# Altium PCB Buck Converter.PcbDoc
Units mm, origin at the board's own origin, x right, y up, seen from the top; angles counter-clockwise.
Board outline 28.43 x 16.88 mm, 2 copper layers (Top Layer, Bottom Layer); 9 components, 6 nets, 22 pads, 6 vias.
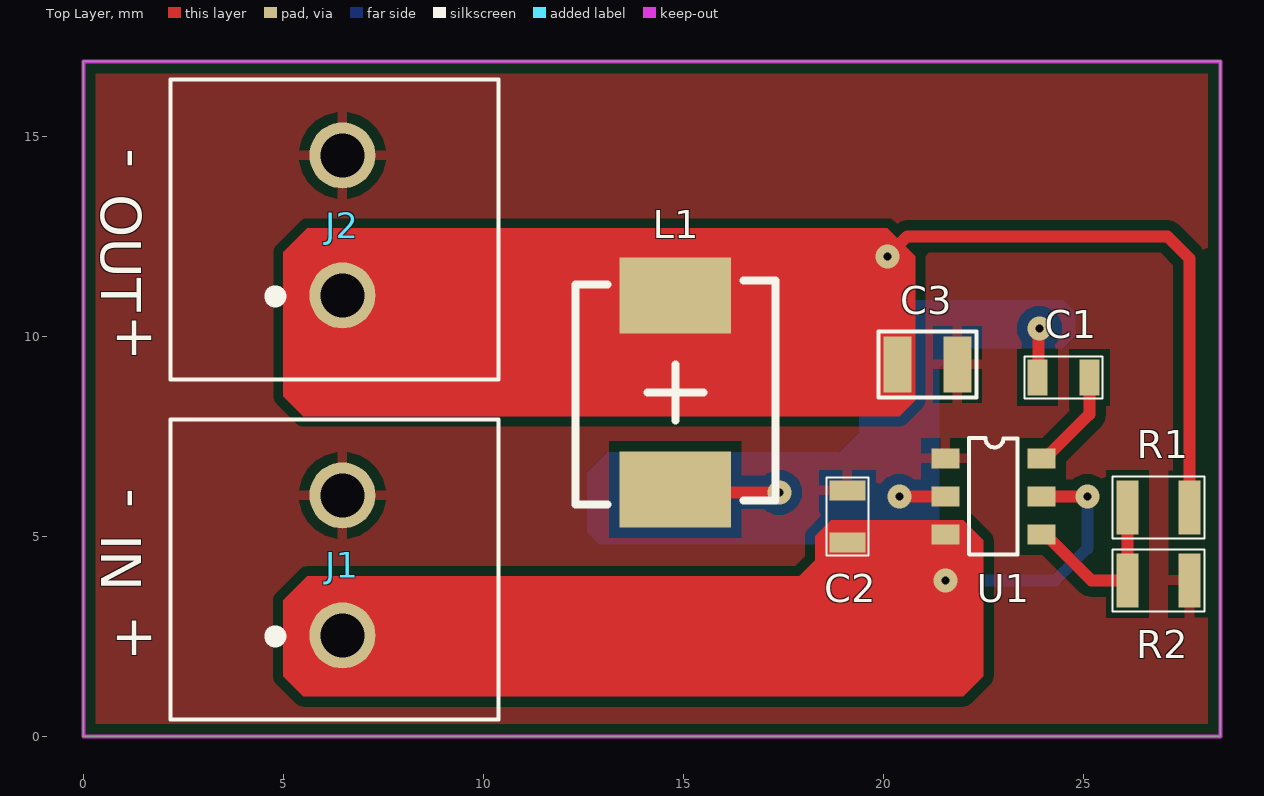
[diagram p0: Top Layer view]
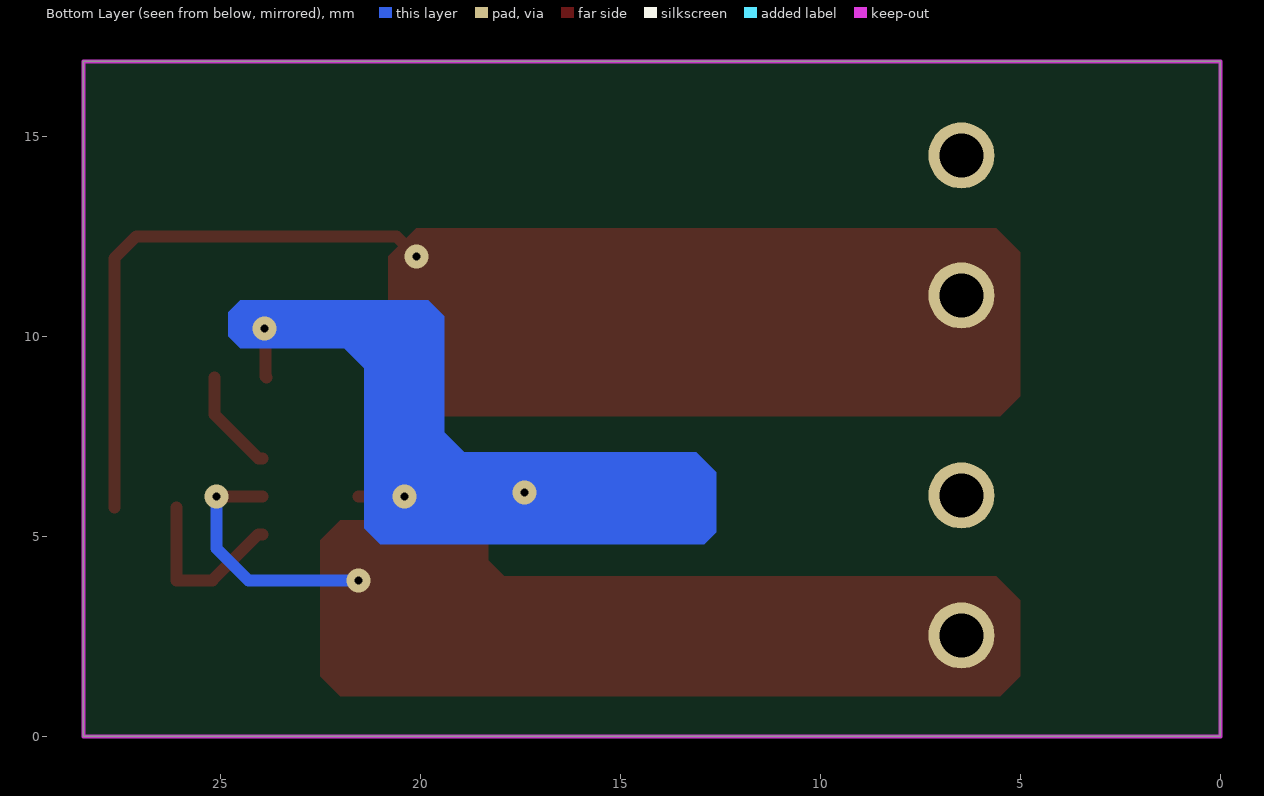
[diagram p1: Bottom Layer view, seen from below]
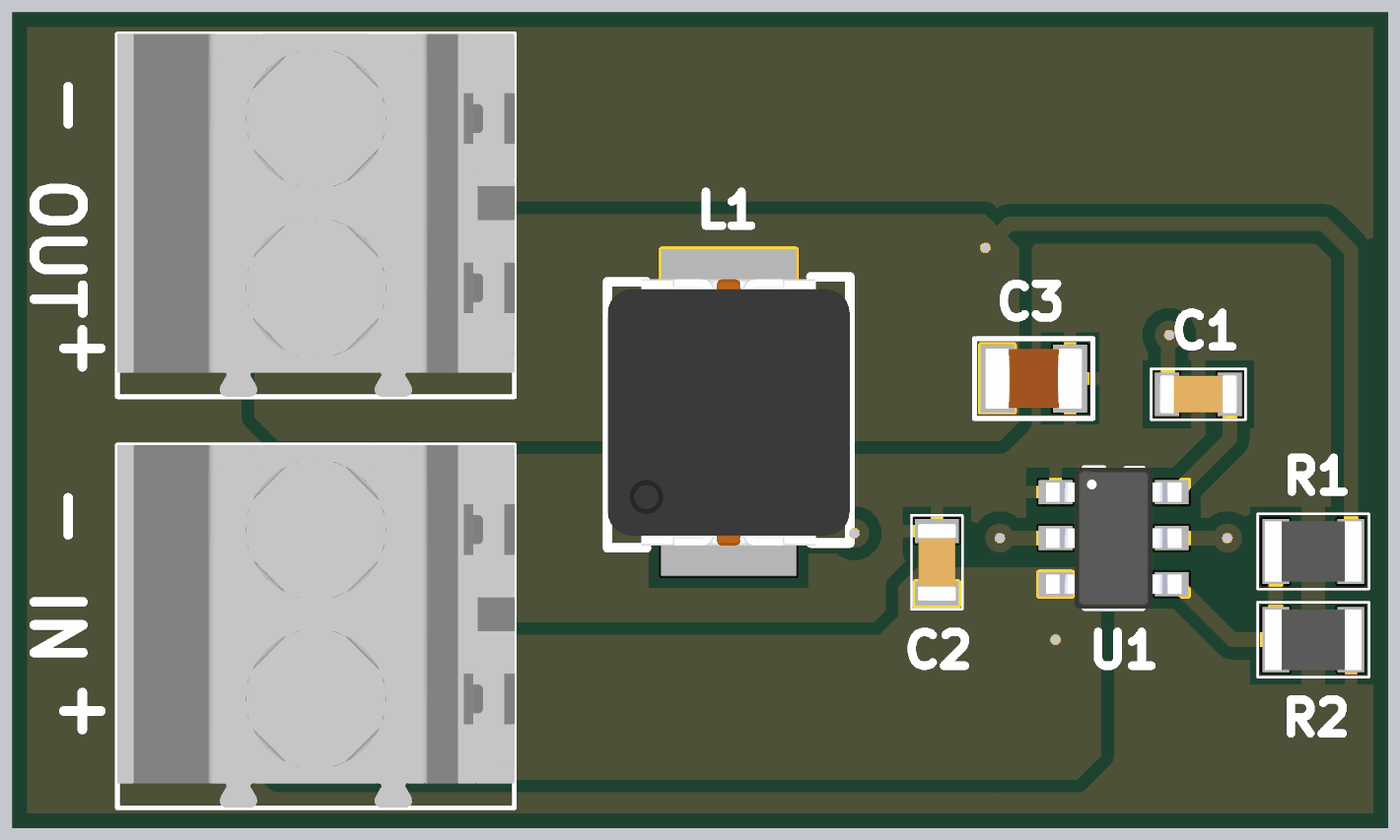
[diagram p2: 3D render of the assembled board from above, using the file's embedded part models]

## Layer stack, top to bottom
Top Solder: solder mask 0.0102, Solder Resist, Dk 3.5
Top Layer: signal copper 0.0356
Dielectric 1: dielectric 0.32, FR-4, Dk 4.8
Bottom Layer: signal copper 0.0356
Bottom Solder: solder mask 0.0102, Solder Resist, Dk 3.5

## Board outline
0,0 28.425,0 28.425,16.875 0,16.875

## Design rules (kind name [scope] priority, off if disabled: settings)
Clearance [All] p1: gap=0.254 ignorepadtopadclearanceinfootprint=FALSE except(0: Arc-Text Arc-Hole Track-Text Track-Hole SMDPad-Text SMDPad-Hole THPad-Text THPad-Hole Via-Text Via-Hole Fill-Text Fill-Hole Poly-Text Poly-Hole Region-Text Region-Hole Text-Text Text-Hole)
PolygonConnect [All] p1: connectstyle=Relief reliefconductorwidth=0.254 reliefentries=4 polygonreliefangle="90 Angle" airgapwidth=0.254
RoutingVias [All] p1: holewidth=0.711 width=1.27 viastyle="Through Hole" minholewidth=0.711 minwidth=1.27 maxholewidth=0.711 maxwidth=1.27
SolderMaskExpansion [All] p1: expansion=0.102 istentingtop=FALSE
Width [All] p1: maxlimit=5 minlimit=0.2 preferedwidth=0.3 minimp=50.000000 maximp=50.000000 favimp=50.000000
30 further rules are at their usual default settings.

## Components (designator, comment, footprint, x,y, rotation, side; value= is the part's Value field where it differs from the comment)
C1 "CC0603KRX7R9BB104" CAP_ALUM_0603 24.5,8.975 r180 top value=0.1µF
C2 "GMC10X5R226M16NT" CAP_ALUM_0603 19.1,5.5 r270 top value=22µF
C3 "MLASL21GBB5476MTNA01" CAP_ALUM_0805 21.1,9.3 r180 top value=47µF
J1 "284391-2" CONNECTOR 6.475,4.275 r90 top
J2 "284391-2" CONNECTOR 6.475,12.775 r90 top
L1 "ETQ-P3M4R7KVP" IND 14.8,8.6 r90 top value=4.7µH
R1 "ERJ-PB6D5622V" RES_0805 26.875,5.725 r0 top value=56.2kΩ
R2 "CRCW080510K0FKEA" RES_0805 26.875,3.9 r180 top value=10kΩ
U1 "TPS561208DDCR" SOT-23-6 22.75,6 r270 top

## Footprints (in the part's own frame and the unit in brackets; to place one, negate y for a bottom-side part, rotate by r counter-clockwise, add the part's x,y. Pads: shape width x height; smd on the part's side, far side on the other; paste and mask are expansions set on the pad)
CAP_ALUM_0603 [mm]
  rect 0.5x0.9 smd mask+0.05: 1(-0.65,0) 2(0.65,0)
  silkscreen extent -0.97,-0.53 0.97,0.53, body extent -0.8,-0.4 0.8,0.4, height 0.9
CAP_ALUM_0805 [mm]
  rect 0.7x1.4 smd mask+0.05: 1(-0.75,0) 2(0.75,0)
  silkscreen extent -1.22,-0.82 1.22,0.82, body extent -1,-0.63 1,0.63, height 1.35
CONNECTOR [mm]
  round 1.65 hole 1.1: 1(-1.75,0) 2(1.75,0)
  silkscreen extent -3.85,-3.9 3.65,4.3, body extent -3.85,-3.9 3.65,4.3, height 12.6
IND [mm]
  rect 1.905x2.79 smd mask+0.05: 1(-2.425,0) 2(2.426,0)
  silkscreen extent -2.8,-2.5 2.8,2.5, body extent -2.75,-2.5 2.75,2.5, height 3
RES_0805 [mm]
  rect 0.55x1.35 smd mask+0.05: 1(-0.775,0) 2(0.775,0)
  silkscreen extent -1.15,-0.77 1.15,0.77, body extent -1,-0.63 1,0.63, height 0.6
SOT-23-6 [mm]
  rect 0.5x0.7 smd mask+0.05: 1(-0.95,-1.2) 2(0,-1.2) 3(0.95,-1.2) 4(0.95,1.2) 5(0,1.2) 6(-0.95,1.2)
  silkscreen extent -1.46,-0.61 1.46,0.61, body extent -1.46,-1.4 1.46,1.4, height 1.25

## Part data
C1: library part "CAP CER 50V 0.1UF", "CAP CER 0.1UF 50V X7R 0603", ComponentLink1Description=https://datasheet.octopart.com:443/CC0603KRX7R9BB104-Yageo-datasheet-177165144.pdf?src-supplier=IHS, ComponentLink1URL=https://datasheet.octopart.com:443/CC0603KRX7R9BB104-Yageo-datasheet-177165144.pdf?src-supplier=IHS, ComponentLink2Description=https://datasheet.octopart.com:443/CC0603KRX7R9BB104-Yageo-datasheet-82288757.pdf?src-supplier=Upverter, ComponentLink2URL=https://datasheet.octopart.com:443/CC0603KRX7R9BB104-Yageo-datasheet-82288757.pdf?src-supplier=Upverter, ComponentLink3Description=https://datasheet.octopart.com:443/CC0603KRX7R9BB104-Yageo-datasheet-68298032.pdf?src-supplier=Upverter, ComponentLink3URL=https://datasheet.octopart.com:443/CC0603KRX7R9BB104-Yageo-datasheet-68298032.pdf?src-supplier=Upverter, ComponentLink4Description=https://datasheet.octopart.com:443/CC0603KRX7R9BB104-Yageo-Group-datasheet-189192896.pdf?src-supplier=Future+Electronics, ComponentLink4URL=https://datasheet.octopart.com:443/CC0603KRX7R9BB104-Yageo-Group-datasheet-189192896.pdf?src-supplier=Future+Electronics, ComponentLink5Description=https://datasheet.octopart.com:443/CC0603KRX7R9BB104-Yageo-datasheet-166511530.pdf?src-supplier=Future+Electronics, ComponentLink5URL=https://datasheet.octopart.com:443/CC0603KRX7R9BB104-Yageo-datasheet-166511530.pdf?src-supplier=Future+Electronics, ComponentLink6Description=https://datasheet.octopart.com:443/CC0603KRX7R9BB104-Yageo-datasheet-137700082.pdf?src-supplier=Future+Electronics, ComponentLink6URL=https://datasheet.octopart.com:443/CC0603KRX7R9BB104-Yageo-datasheet-137700082.pdf?src-supplier=Future+Electronics, ComponentLink7Description=https://datasheet.octopart.com:443/CC0603KRX7R9BB104-Yageo-datasheet-137700084.pdf?src-supplier=Future+Electronics, ComponentLink7URL=https://datasheet.octopart.com:443/CC0603KRX7R9BB104-Yageo-datasheet-137700084.pdf?src-supplier=Future+Electronics, ComponentLink8Description=https://datasheet.octopart.com:443/CC0603KRX7R9BB104-Yageo-datasheet-27626582.pdf?src-supplier=Future+Electronics, ComponentLink8URL=https://datasheet.octopart.com:443/CC0603KRX7R9BB104-Yageo-datasheet-27626582.pdf?src-supplier=Future+Electronics, ComponentLink9Description=https://datasheet.octopart.com:443/CC0603KRX7R9BB104-Yageo-datasheet-15895757.pdf?src-supplier=Future+Electronics, ComponentLink9URL=https://datasheet.octopart.com:443/CC0603KRX7R9BB104-Yageo-datasheet-15895757.pdf?src-supplier=Future+Electronics, ComponentLink10Description=https://datasheet.octopart.com:443/CC0603KRX7R9BB104-Yageo-datasheet-8324192.pdf?src-supplier=Future+Electronics, ComponentLink10URL=https://datasheet.octopart.com:443/CC0603KRX7R9BB104-Yageo-datasheet-8324192.pdf?src-supplier=Future+Electronics, ComponentLink11Description=https://datasheet.octopart.com/CC0603KRX7R9BB104-Yageo-datasheet-10883670.pdf, ComponentLink11URL=https://datasheet.octopart.com/CC0603KRX7R9BB104-Yageo-datasheet-10883670.pdf, ComponentLink12Description=https://datasheet.octopart.com/CC0603KRX7R9BB104-Yageo-datasheet-12526321.pdf, ComponentLink12URL=https://datasheet.octopart.com/CC0603KRX7R9BB104-Yageo-datasheet-12526321.pdf, ComponentLink13Description=https://datasheet.octopart.com:443/CC0603KRX7R9BB104-Yageo-datasheet-181968726.pdf?src-supplier=Newark, ComponentLink13URL=https://datasheet.octopart.com:443/CC0603KRX7R9BB104-Yageo-datasheet-181968726.pdf?src-supplier=Newark, ComponentLink14Description=https://datasheet.octopart.com:443/CC0603KRX7R9BB104-Yageo-datasheet-499490.pdf?src-supplier=Newark, ComponentLink14URL=https://datasheet.octopart.com:443/CC0603KRX7R9BB104-Yageo-datasheet-499490.pdf?src-supplier=Newark, ComponentLink15Description=https://datasheet.octopart.com:443/CC0603KRX7R9BB104-Yageo-datasheet-62336348.pdf?src-supplier=Newark, ComponentLink15URL=https://datasheet.octopart.com:443/CC0603KRX7R9BB104-Yageo-datasheet-62336348.pdf?src-supplier=Newark, ComponentLink16Description=https://datasheet.octopart.com:443/CC0603KRX7R9BB104-Yageo-datasheet-147453679.pdf?src-supplier=Newark, ComponentLink16URL=https://datasheet.octopart.com:443/CC0603KRX7R9BB104-Yageo-datasheet-147453679.pdf?src-supplier=Newark, ComponentLink17Description=https://datasheet.octopart.com:443/CC0603KRX7R9BB104-Yageo-datasheet-151948686.pdf?src-supplier=Farnell, ComponentLink17URL=https://datasheet.octopart.com:443/CC0603KRX7R9BB104-Yageo-datasheet-151948686.pdf?src-supplier=Farnell, ComponentLink18Description=https://datasheet.octopart.com:443/CC0603KRX7R9BB104-Yageo-datasheet-500777.pdf?src-supplier=Farnell, ComponentLink18URL=https://datasheet.octopart.com:443/CC0603KRX7R9BB104-Yageo-datasheet-500777.pdf?src-supplier=Farnell, ComponentLink19Description=https://datasheet.octopart.com:443/CC0603KRX7R9BB104-Yageo-datasheet-178019014.pdf?src-supplier=Burklin+Elektronik, ComponentLink19URL=https://datasheet.octopart.com:443/CC0603KRX7R9BB104-Yageo-datasheet-178019014.pdf?src-supplier=Burklin+Elektronik, ComponentLink20Description=https://datasheet.octopart.com:443/CC0603KRX7R9BB104-Yageo-Group-datasheet-165992755.pdf?src-supplier=ODG+(Origin+Data+Global), ComponentLink20URL=https://datasheet.octopart.com:443/CC0603KRX7R9BB104-Yageo-Group-datasheet-165992755.pdf?src-supplier=ODG+(Origin+Data+Global), ComponentLink21Description=https://datasheet.octopart.com:443/CC0603KRX7R9BB104-Yageo-datasheet-140260305.pdf?src-supplier=SOS+electronic, ComponentLink21URL=https://datasheet.octopart.com:443/CC0603KRX7R9BB104-Yageo-datasheet-140260305.pdf?src-supplier=SOS+electronic, ComponentLink22Description=https://datasheet.octopart.com:443/CC0603KRX7R9BB104-Yageo-datasheet-120101875.pdf?src-supplier=Megastar, ComponentLink22URL=https://datasheet.octopart.com:443/CC0603KRX7R9BB104-Yageo-datasheet-120101875.pdf?src-supplier=Megastar, ComponentLink23Description=https://datasheet.octopart.com:443/CC0603KRX7R9BB104-Yageo-datasheet-8701427.pdf?src-supplier=element14, ComponentLink23URL=https://datasheet.octopart.com:443/CC0603KRX7R9BB104-Yageo-datasheet-8701427.pdf?src-supplier=element14, ComponentLink24Description=https://datasheet.octopart.com:443/CC0603KRX7R9BB104-Yageo-datasheet-5301394.pdf?src-supplier=element14, ComponentLink24URL=https://datasheet.octopart.com:443/CC0603KRX7R9BB104-Yageo-datasheet-5301394.pdf?src-supplier=element14, ComponentLink25Description=https://datasheet.octopart.com:443/CC0603KRX7R9BB104-Yageo-datasheet-17600895.pdf?src-supplier=TME, ComponentLink25URL=https://datasheet.octopart.com:443/CC0603KRX7R9BB104-Yageo-datasheet-17600895.pdf?src-supplier=TME, ComponentLink26Description=http://sigma.octopart.com:80/15889575/rohs_statement/Yageo-CC0603KRX7R9BB104.pdf?src-supplier=Compliance+Statements, ComponentLink26URL=http://sigma.octopart.com:80/15889575/rohs_statement/Yageo-CC0603KRX7R9BB104.pdf?src-supplier=Compliance+Statements, ComponentLink27Description=http://sigma.octopart.com:80/rohs_statement/Surface-Mount-Ceramic-Multilayer-Capacitors%3B-General-Purpose-%26-High-Capacitance-Class-2%2C-X7R-Yageo-family-124.pdf?src-supplier=Compliance+Statements, ComponentLink27URL=http://sigma.octopart.com:80/rohs_statement/Surface-Mount-Ceramic-Multilayer-Capacitors%3B-General-Purpose-%26-High-Capacitance-Class-2%2C-X7R-Yageo-family-124.pdf?src-supplier=Compliance+Statements, ComponentLink28Description=http://sigma.octopart.com:80/reach_statement/Surface-Mount-Ceramic-Multilayer-Capacitors%3B-General-Purpose-%26-High-Capacitance-Class-2%2C-X7R-Yageo-family-125.pdf?src-supplier=Compliance+Statements, ComponentLink28URL=http://sigma.octopart.com:80/reach_statement/Surface-Mount-Ceramic-Multilayer-Capacitors%3B-General-Purpose-%26-High-Capacitance-Class-2%2C-X7R-Yageo-family-125.pdf?src-supplier=Compliance+Statements, ComponentLink29Description=http://sigma.octopart.com:80/conflict_mineral_statement/Yageo-company-3.pdf?src-supplier=Compliance+Statements, ComponentLink29URL=http://sigma.octopart.com:80/conflict_mineral_statement/Yageo-company-3.pdf?src-supplier=Compliance+Statements, Designed by=Ali
C2: library part "CAP CER 16V 22UF", "CAP CER 22UF 16V X5R 0603", Designed by=Ali
C3: library part "CAP CER 10V 47UF", "CAP CER 47UF 10V X5R 0805", ComponentLink1Description=https://datasheet.octopart.com:443/MLASL21GBB5476MTNA01-Taiyo-Yuden-datasheet-182109626.pdf?src-supplier=IHS, ComponentLink1URL=https://datasheet.octopart.com:443/MLASL21GBB5476MTNA01-Taiyo-Yuden-datasheet-182109626.pdf?src-supplier=IHS, Designed by=Ali
J1 J2: library part "2POS CONNECTOR", "TERM BLK 2POS 3.5MM PCB", ComponentLink1Description=https://datasheet.octopart.com:443/TB006-508-02BE-Same-Sky-datasheet-181920258.pdf?src-supplier=Same+Sky, ComponentLink1URL=https://datasheet.octopart.com:443/TB006-508-02BE-Same-Sky-datasheet-181920258.pdf?src-supplier=Same+Sky, ComponentLink2Description=https://datasheet.octopart.com:443/TB006-508-02BE-CUI-Devices-datasheet-175928139.pdf?src-supplier=Same+Sky, ComponentLink2URL=https://datasheet.octopart.com:443/TB006-508-02BE-CUI-Devices-datasheet-175928139.pdf?src-supplier=Same+Sky, ComponentLink3Description=https://datasheet.octopart.com:443/TB006-508-02BE-CUI-Devices-datasheet-144794960.pdf?src-supplier=Same+Sky, ComponentLink3URL=https://datasheet.octopart.com:443/TB006-508-02BE-CUI-Devices-datasheet-144794960.pdf?src-supplier=Same+Sky, ComponentLink4Description=https://datasheet.octopart.com:443/TB006-508-02BE-CUI-Devices-datasheet-180438495.pdf?src-supplier=IHS, ComponentLink4URL=https://datasheet.octopart.com:443/TB006-508-02BE-CUI-Devices-datasheet-180438495.pdf?src-supplier=IHS, ComponentLink5Description=https://datasheet.octopart.com:443/TB006-508-02BE-Same-Sky-datasheet-182881446.pdf?src-supplier=Electro+Sonic, ComponentLink5URL=https://datasheet.octopart.com:443/TB006-508-02BE-Same-Sky-datasheet-182881446.pdf?src-supplier=Electro+Sonic, ComponentLink6Description=https://datasheet.octopart.com:443/TB006-508-02BE-CUI-Devices-datasheet-154730747.pdf?src-supplier=Electro+Sonic, ComponentLink6URL=https://datasheet.octopart.com:443/TB006-508-02BE-CUI-Devices-datasheet-154730747.pdf?src-supplier=Electro+Sonic, ComponentLink7Description=https://datasheet.octopart.com:443/TB006-508-02BE-CUI-Devices-datasheet-175927972.pdf?src-supplier=CUI+Devices+SCT, ComponentLink7URL=https://datasheet.octopart.com:443/TB006-508-02BE-CUI-Devices-datasheet-175927972.pdf?src-supplier=CUI+Devices+SCT, ComponentLink8Description=https://datasheet.octopart.com:443/TB006-508-02BE-CUI-Devices-datasheet-142371922.pdf?src-supplier=Future+Electronics, ComponentLink8URL=https://datasheet.octopart.com:443/TB006-508-02BE-CUI-Devices-datasheet-142371922.pdf?src-supplier=Future+Electronics, ComponentLink9Description=https://datasheet.octopart.com:443/TB006-508-02BE-Same-Sky-datasheet-182050254.pdf?src-supplier=Future+Electronics, ComponentLink9URL=https://datasheet.octopart.com:443/TB006-508-02BE-Same-Sky-datasheet-182050254.pdf?src-supplier=Future+Electronics, ComponentLink10Description=https://datasheet.octopart.com:443/TB006-508-02BE-CUI-Devices-datasheet-175928504.pdf?src-supplier=Future+Electronics, ComponentLink10URL=https://datasheet.octopart.com:443/TB006-508-02BE-CUI-Devices-datasheet-175928504.pdf?src-supplier=Future+Electronics, ComponentLink11Description=https://datasheet.octopart.com:443/TB006-508-02BE-CUI-Devices-datasheet-147843966.pdf?src-supplier=Future+Electronics, ComponentLink11URL=https://datasheet.octopart.com:443/TB006-508-02BE-CUI-Devices-datasheet-147843966.pdf?src-supplier=Future+Electronics, ComponentLink12Description=https://datasheet.octopart.com:443/TB006-508-02BE-Same-Sky-datasheet-189105716.pdf?src-supplier=Master+Electronics, ComponentLink12URL=https://datasheet.octopart.com:443/TB006-508-02BE-Same-Sky-datasheet-189105716.pdf?src-supplier=Master+Electronics, ComponentLink13Description=https://octopart.com:443/opatz8j6/c1?t=fHsI-vJGq0ax3YV4VPVX9765FQLYLnKawkvhVDY2wGW7NsuHLeMmTTnAN8UF06CQPZs48yB-5xz3sL1w5bxWn8qPeiAw10ubbZDHCopwzJcKDiScSo2o5eGfu6tkPQfY8CPLZDvg6-vEfr5aGAxKfcCfYOMvpy_RDBMuQ-hK4ibS6nRTua2f-pcHEJXDh_hBDeocoF22sNH7d1da-SKWMaMDwrpdFRByHucT0U62h2nK3zIbhpnAiH4iZCnOR73LxqY7SbkS3MsMgNkZjyv03hRFiZl1QedJoj0oJD4YkDR3Iwm0DGh6iMs89pr1KypduVaRs30rPEQo-Hyta07xICoRDgViDZT-o4-05qdJ&src-supplier=Compliance+Statements, ComponentLink13URL=https://octopart.com:443/opatz8j6/c1?t=fHsI-vJGq0ax3YV4VPVX9765FQLYLnKawkvhVDY2wGW7NsuHLeMmTTnAN8UF06CQPZs48yB-5xz3sL1w5bxWn8qPeiAw10ubbZDHCopwzJcKDiScSo2o5eGfu6tkPQfY8CPLZDvg6-vEfr5aGAxKfcCfYOMvpy_RDBMuQ-hK4ibS6nRTua2f-pcHEJXDh_hBDeocoF22sNH7d1da-SKWMaMDwrpdFRByHucT0U62h2nK3zIbhpnAiH4iZCnOR73LxqY7SbkS3MsMgNkZjyv03hRFiZl1QedJoj0oJD4YkDR3Iwm0DGh6iMs89pr1KypduVaRs30rPEQo-Hyta07xICoRDgViDZT-o4-05qdJ&src-supplier=Compliance+Statements, ComponentLink14Description=https://octopart.com:443/opatz8j6/c1?t=dM8eYxaDjL-kaGKmpQdjQWWEnU0blebvyTfTg2Rd3ApnP0UDE0_21QnWTJTGPDp9ytAa8tI3FlrDP95A3o_BkvgjWebh62Rb0h4w5pdUEDvMppSZf9I2FkcMVfX_KODmYkYqAUk2J34LktI7ilXeyahGaPsFEFmJ14Qpe_e4WQb7vSWg98nQTbt98nmPt5nbp9Om0G6lN1r0aO0w1HyXWmIGCs0ZKZYERynt6qeI2t6k4UiW3G0ar8-zdiHltbn3Uug6IoKqAm4iCKe5-FP6rZ7LyBAXLGYUwzzXGEbZlMJyi7fV-f2HbCXfbrUN-lArhVr4RKA0cMCPAVhKnfwYpS3HsZn96be7tbt9nomaLsRb7g&src-supplier=Compliance+Statements, ComponentLink14URL=https://octopart.com:443/opatz8j6/c1?t=dM8eYxaDjL-kaGKmpQdjQWWEnU0blebvyTfTg2Rd3ApnP0UDE0_21QnWTJTGPDp9ytAa8tI3FlrDP95A3o_BkvgjWebh62Rb0h4w5pdUEDvMppSZf9I2FkcMVfX_KODmYkYqAUk2J34LktI7ilXeyahGaPsFEFmJ14Qpe_e4WQb7vSWg98nQTbt98nmPt5nbp9Om0G6lN1r0aO0w1HyXWmIGCs0ZKZYERynt6qeI2t6k4UiW3G0ar8-zdiHltbn3Uug6IoKqAm4iCKe5-FP6rZ7LyBAXLGYUwzzXGEbZlMJyi7fV-f2HbCXfbrUN-lArhVr4RKA0cMCPAVhKnfwYpS3HsZn96be7tbt9nomaLsRb7g&src-supplier=Compliance+Statements, ComponentLink15Description=https://octopart.com:443/opatz8j6/c1?t=bw9KZVLlhUqzXoXFRxbELXwAHqW3rYXbl3kz-D70DphFXaJpKM257BgSLnuP8i28oPvEALo2tZA53BhLcUzl5dRb2JOYxLqfI5xvQrkPOl21mmNK4yZO-iltfw1O2MyUgoFo79I6m7IyZirIkd8BTJ6SXlUH-CcdG805aetUs4r3ebpuYTN5yQUnPf8M5eAN6xCifqBWiRhkVNuklpDjmWbPI3nDwC94Sucq-8REIvVdAtJH-q2SkBY-nLcUgY8rcGenqHU6yf7Y4n9YSf-GElQJbIOiT_i1cykaUrV9Yz4c8IA8EYsemTqzfugObHR9KMsqFN2i-Mp5nta0N661Y-6au3dk2z2tQkVn3QdZ&src-supplier=Compliance+Statements, ComponentLink15URL=https://octopart.com:443/opatz8j6/c1?t=bw9KZVLlhUqzXoXFRxbELXwAHqW3rYXbl3kz-D70DphFXaJpKM257BgSLnuP8i28oPvEALo2tZA53BhLcUzl5dRb2JOYxLqfI5xvQrkPOl21mmNK4yZO-iltfw1O2MyUgoFo79I6m7IyZirIkd8BTJ6SXlUH-CcdG805aetUs4r3ebpuYTN5yQUnPf8M5eAN6xCifqBWiRhkVNuklpDjmWbPI3nDwC94Sucq-8REIvVdAtJH-q2SkBY-nLcUgY8rcGenqHU6yf7Y4n9YSf-GElQJbIOiT_i1cykaUrV9Yz4c8IA8EYsemTqzfugObHR9KMsqFN2i-Mp5nta0N661Y-6au3dk2z2tQkVn3QdZ&src-supplier=Compliance+Statements, ComponentLink16Description=https://octopart.com:443/opatz8j6/c1?t=51W4uELkvxqfUgcIORfpkyxNe7hFBhvZiV9jpN1tEL-YWHEtWaoW2GVQnAOGKJV-z-ol0-_zKhVIcSsi0cDlA68krw4fx2Tll0M7j4YXqaaOkm2YpeImxqaVcoAg0sbXHdHWd_xv5ZmzRu1QU3XJyBCDKJVhl-DkFV-Gbea_txV3WYqFkyjjDBkk5sQEpYYc18TquNJ1WUsD0jPnTO40UBXveCrexaP0Dssqdv973MDQ-gsb1JvuQaNQ02QWuz2AHuz4CQI0jUYr4Q0KYYeTWZS-j8dvoUxhQBS5tGPQW3pLx6CMY7iLvYYpoXat0phkzwFSmDBGFA8ZFzihO1kpn-qdPV396rJrWlhwdY9ORzL6zg&src-supplier=Compliance+Statements, ComponentLink16URL=https://octopart.com:443/opatz8j6/c1?t=51W4uELkvxqfUgcIORfpkyxNe7hFBhvZiV9jpN1tEL-YWHEtWaoW2GVQnAOGKJV-z-ol0-_zKhVIcSsi0cDlA68krw4fx2Tll0M7j4YXqaaOkm2YpeImxqaVcoAg0sbXHdHWd_xv5ZmzRu1QU3XJyBCDKJVhl-DkFV-Gbea_txV3WYqFkyjjDBkk5sQEpYYc18TquNJ1WUsD0jPnTO40UBXveCrexaP0Dssqdv973MDQ-gsb1JvuQaNQ02QWuz2AHuz4CQI0jUYr4Q0KYYeTWZS-j8dvoUxhQBS5tGPQW3pLx6CMY7iLvYYpoXat0phkzwFSmDBGFA8ZFzihO1kpn-qdPV396rJrWlhwdY9ORzL6zg&src-supplier=Compliance+Statements, Designed by=Ali
L1: library part "IND SMD 4.7UH 4.1A", "FIXED IND 4.7UH 4.1A 50.16 MOHM", Case/Package=2220, DC Resistance (DCR)=50.16mΩ, Manufacturer=Panasonic, Manufacturer Lifecycle Status=ACTIVE, Manufacturer Package Identifier=PCC-M0530M-LP, Manufacturer Part Number=ETQP3M4R7KVP, Max Current Rating=4.1A, Max Operating Temperature=155°C, Min Operating Temperature=-55°C, Saturation Current=6.7A, Supplier Part Number=2545717, Test Frequency=100kHz, Tolerance=20%, Category="Fixed Inductors", ComponentLink1Description=https://datasheet.octopart.com:443/ETQP3M4R7KVP-Panasonic-datasheet-180975437.pdf?src-supplier=IHS, ComponentLink1URL=https://datasheet.octopart.com:443/ETQP3M4R7KVP-Panasonic-datasheet-180975437.pdf?src-supplier=IHS, ComponentLink2Description=https://datasheet.octopart.com:443/ETQP3M4R7KVP-Panasonic-datasheet-98950113.pdf?src-supplier=Panasonic, ComponentLink2URL=https://datasheet.octopart.com:443/ETQP3M4R7KVP-Panasonic-datasheet-98950113.pdf?src-supplier=Panasonic, ComponentLink3Description=https://datasheet.octopart.com:443/ETQP3M4R7KVP-Panasonic-datasheet-136412728.pdf?src-supplier=Newark, ComponentLink3URL=https://datasheet.octopart.com:443/ETQP3M4R7KVP-Panasonic-datasheet-136412728.pdf?src-supplier=Newark, ComponentLink4Description=https://datasheet.octopart.com:443/ETQP3M4R7KVP-Panasonic-datasheet-65850535.pdf?src-supplier=SOS+electronic, ComponentLink4URL=https://datasheet.octopart.com:443/ETQP3M4R7KVP-Panasonic-datasheet-65850535.pdf?src-supplier=SOS+electronic, ComponentLink5Description=https://datasheet.octopart.com:443/ETQP3M4R7KVP-Panasonic-datasheet-66615529.pdf?src-supplier=element14+APAC, ComponentLink5URL=https://datasheet.octopart.com:443/ETQP3M4R7KVP-Panasonic-datasheet-66615529.pdf?src-supplier=element14+APAC, ComponentLink6Description=https://datasheet.octopart.com:443/ETQP3M4R7KVP-Panasonic-datasheet-78834738.pdf?src-supplier=element14+APAC, ComponentLink6URL=https://datasheet.octopart.com:443/ETQP3M4R7KVP-Panasonic-datasheet-78834738.pdf?src-supplier=element14+APAC, ComponentLink7Description=https://datasheet.octopart.com:443/ETQP3M4R7KVP-Panasonic-datasheet-61114973.pdf?src-supplier=element14+APAC, ComponentLink7URL=https://datasheet.octopart.com:443/ETQP3M4R7KVP-Panasonic-datasheet-61114973.pdf?src-supplier=element14+APAC, ComponentLink8Description=https://sigma.octopart.com:443/150570891/technical_drawing/Panasonic-ETQP3M4R7KVP.pdf?src-supplier=Panasonic+SCT, ComponentLink8URL=https://sigma.octopart.com:443/150570891/technical_drawing/Panasonic-ETQP3M4R7KVP.pdf?src-supplier=Panasonic+SCT, ComponentLink9Description=https://datasheet.octopart.com:443/ETQP3M4R7KVP-Panasonic-datasheet-137675050.pdf?src-supplier=TME, ComponentLink9URL=https://datasheet.octopart.com:443/ETQP3M4R7KVP-Panasonic-datasheet-137675050.pdf?src-supplier=TME, ComponentLink10Description=https://datasheet.octopart.com:443/ETQP3M4R7KVP-Panasonic-datasheet-81843036.pdf?src-supplier=Farnell, ComponentLink10URL=https://datasheet.octopart.com:443/ETQP3M4R7KVP-Panasonic-datasheet-81843036.pdf?src-supplier=Farnell, Composition=Wirewound, Country of Origin=Japan, Designed by=Ali, ESR=50.16mΩ, Export Control Classification Number (ECCN) Code=EAR99, Harmonized Tariff Schedule (HTS) Code=8504.50.80.00, Height=3mm, Lifecycle Status=Production, Mounting Technology="Surface Mount", Number of Circuits=1, Number of Terminals=2, Packaging="Cut Tape", Part Series="Power Choke Coil for Automotive-LP (MC type)", Pricing="10=0,574, 100=0,473, 500=0,413, 1000=0,389, 2000=0,374, 4000=0,348 (EUR)", REACH SVHC=Yes, RMS Current (Irms)=4.1A, RoHS=Compliant, Schedule B=8504500000, Shielding=Yes, Stock=3910, Supplier=Farnell, Width=5mm, Inductance Tolerance=20%, Introduction Date=2016-06-23
R1: library part "RES SMD 56.2K OHM 0805", "RES SMD 56.2K OHM 0.5% 1/4W 0805", ComponentLink1Description=https://datasheet.octopart.com:443/RP73PF1J56K2BTDF-TE-Connectivity-datasheet-179148511.pdf?src-supplier=IHS, ComponentLink1URL=https://datasheet.octopart.com:443/RP73PF1J56K2BTDF-TE-Connectivity-datasheet-179148511.pdf?src-supplier=IHS, ComponentLink2Description=https://datasheet.octopart.com:443/RP73PF1J56K2BTDF-TE-Connectivity-datasheet-140899247.pdf?src-supplier=IHS, ComponentLink2URL=https://datasheet.octopart.com:443/RP73PF1J56K2BTDF-TE-Connectivity-datasheet-140899247.pdf?src-supplier=IHS, ComponentLink3Description=https://datasheet.octopart.com:443/RP73PF1J56K2BTDF-Tyco-Electronics-datasheet-11516962.pdf?src-supplier=RS+(Formerly+Allied+Electronics), ComponentLink3URL=https://datasheet.octopart.com:443/RP73PF1J56K2BTDF-Tyco-Electronics-datasheet-11516962.pdf?src-supplier=RS+(Formerly+Allied+Electronics), ComponentLink4Description=https://datasheet.octopart.com:443/6-2176089-7-TE-Connectivity---AMP-datasheet-97102182.pdf?src-supplier=Electro+Sonic, ComponentLink4URL=https://datasheet.octopart.com:443/6-2176089-7-TE-Connectivity---AMP-datasheet-97102182.pdf?src-supplier=Electro+Sonic, ComponentLink5Description=https://datasheet.octopart.com:443/RP73PF1J56K2BTDF-Tyco-Electronics-datasheet-11120217.pdf?src-supplier=Farnell, ComponentLink5URL=https://datasheet.octopart.com:443/RP73PF1J56K2BTDF-Tyco-Electronics-datasheet-11120217.pdf?src-supplier=Farnell, Designed by=Ali
R2: library part "RES SMD 10K OHM 0805", "RES SMD 10K OHM 1% 1/4W 0805", ComponentLink1Description=https://datasheet.octopart.com:443/RNCF0603DTE10K0-Stackpole-Electronics-datasheet-182148124.pdf?src-supplier=IHS, ComponentLink1URL=https://datasheet.octopart.com:443/RNCF0603DTE10K0-Stackpole-Electronics-datasheet-182148124.pdf?src-supplier=IHS, ComponentLink2Description=https://datasheet.octopart.com:443/RNCF0603DTE10K0-Stackpole-Electronics-datasheet-141158876.pdf?src-supplier=Stackpole+Electronics, ComponentLink2URL=https://datasheet.octopart.com:443/RNCF0603DTE10K0-Stackpole-Electronics-datasheet-141158876.pdf?src-supplier=Stackpole+Electronics, ComponentLink3Description=https://datasheet.octopart.com:443/RNCF0603DTE10K0-Stackpole-Electronics-datasheet-12511394.pdf?src-supplier=Stackpole+Electronics, ComponentLink3URL=https://datasheet.octopart.com:443/RNCF0603DTE10K0-Stackpole-Electronics-datasheet-12511394.pdf?src-supplier=Stackpole+Electronics, ComponentLink4Description=https://datasheet.octopart.com:443/RNCF0603DTE10K0-Stackpole-Electronics-datasheet-10788241.pdf?src-supplier=Stackpole+Electronics, ComponentLink4URL=https://datasheet.octopart.com:443/RNCF0603DTE10K0-Stackpole-Electronics-datasheet-10788241.pdf?src-supplier=Stackpole+Electronics, ComponentLink5Description=https://datasheet.octopart.com:443/RNCF0603DTE10K0-Stackpole-Electronics-datasheet-155966811.pdf?src-supplier=Electro+Sonic, ComponentLink5URL=https://datasheet.octopart.com:443/RNCF0603DTE10K0-Stackpole-Electronics-datasheet-155966811.pdf?src-supplier=Electro+Sonic, ComponentLink6Description=https://datasheet.octopart.com:443/RNCF0603DTE10K0-Stackpole-Electronics-datasheet-28504821.pdf?src-supplier=Future+Electronics, ComponentLink6URL=https://datasheet.octopart.com:443/RNCF0603DTE10K0-Stackpole-Electronics-datasheet-28504821.pdf?src-supplier=Future+Electronics, ComponentLink7Description=https://datasheet.octopart.com/RNCF0603DTE10K0-Stackpole-Electronics-datasheet-11755897.pdf, ComponentLink7URL=https://datasheet.octopart.com/RNCF0603DTE10K0-Stackpole-Electronics-datasheet-11755897.pdf, ComponentLink8Description=http://sigma.octopart.com:80/15941409/materials_sheet/Stackpole-Electronics-RNCF0603DTE10K0.pdf?src-supplier=Compliance+Statements, ComponentLink8URL=http://sigma.octopart.com:80/15941409/materials_sheet/Stackpole-Electronics-RNCF0603DTE10K0.pdf?src-supplier=Compliance+Statements, ComponentLink9Description=http://sigma.octopart.com:80/141158212/rohs_statement/Stackpole-Electronics-RNCF0603DTE10K0.pdf?src-supplier=Compliance+Statements, ComponentLink9URL=http://sigma.octopart.com:80/141158212/rohs_statement/Stackpole-Electronics-RNCF0603DTE10K0.pdf?src-supplier=Compliance+Statements, ComponentLink10Description=http://sigma.octopart.com:80/141158211/reach_statement/Stackpole-Electronics-RNCF0603DTE10K0.pdf?src-supplier=Compliance+Statements, ComponentLink10URL=http://sigma.octopart.com:80/141158211/reach_statement/Stackpole-Electronics-RNCF0603DTE10K0.pdf?src-supplier=Compliance+Statements, Designed by=Ali
U1: library part "BUCK SWITCHING 5V 1A", "IC REG BUCK ADJ 1A SOT23", ComponentLink1Description=https://datasheet.octopart.com:443/MLASL21GBB5476MTNA01-Taiyo-Yuden-datasheet-182109626.pdf?src-supplier=IHS, ComponentLink1URL=https://datasheet.octopart.com:443/MLASL21GBB5476MTNA01-Taiyo-Yuden-datasheet-182109626.pdf?src-supplier=IHS, ComponentLink2Description=https://sigma.octopart.com:443/180581133/technical_drawing/Texas-Instruments-TPS561208DDCR.pdf?src-supplier=Texas+Instruments, ComponentLink2URL=https://sigma.octopart.com:443/180581133/technical_drawing/Texas-Instruments-TPS561208DDCR.pdf?src-supplier=Texas+Instruments, ComponentLink3Description=https://octopart.com:443/opatz8j6/c1?t=X-b0HHisZbH55NsDw1gLTTjGk-a9CqkXjLyk6wQz6IvtKiHi1FfcTRZ-jtPM-JOr5bQu5O1dXwOa_G9AG1cqx6Rsj9qm9QhslHmtGULxFHJZTPGvjE1_I1l0IDURebwVyeHa78q0f3R3m6KGSACMzktOannogAKMubn1t5dyydMkdTpKes7VihHz0iTczMjt9sgeRYa2cnbtgERBHX1HsZgUHSomXGLzDOvFgPiL8eazJAh9Y_eBqwfhSyfDQ61ZKEDLnD3ZwxjY4kChkzi6x9zuTSfQYIVKf7rNSEGVDXF1NodZ8MRT7-ePkd6k-SI1Q9SbFhD52LhXQb95D5_CoWV6qrtZuyIjyNSt9hbVxuzVMLcV2Ir8jiAVCph9DZVpHg_8kvDdcA&src-supplier=Texas+Instruments, ComponentLink3URL=https://octopart.com:443/opatz8j6/c1?t=X-b0HHisZbH55NsDw1gLTTjGk-a9CqkXjLyk6wQz6IvtKiHi1FfcTRZ-jtPM-JOr5bQu5O1dXwOa_G9AG1cqx6Rsj9qm9QhslHmtGULxFHJZTPGvjE1_I1l0IDURebwVyeHa78q0f3R3m6KGSACMzktOannogAKMubn1t5dyydMkdTpKes7VihHz0iTczMjt9sgeRYa2cnbtgERBHX1HsZgUHSomXGLzDOvFgPiL8eazJAh9Y_eBqwfhSyfDQ61ZKEDLnD3ZwxjY4kChkzi6x9zuTSfQYIVKf7rNSEGVDXF1NodZ8MRT7-ePkd6k-SI1Q9SbFhD52LhXQb95D5_CoWV6qrtZuyIjyNSt9hbVxuzVMLcV2Ir8jiAVCph9DZVpHg_8kvDdcA&src-supplier=Texas+Instruments, ComponentLink4Description=https://sigma.octopart.com:443/179311906/technical_drawing/Texas-Instruments-TPS561208DDCR.pdf?src-supplier=Texas+Instruments, ComponentLink4URL=https://sigma.octopart.com:443/179311906/technical_drawing/Texas-Instruments-TPS561208DDCR.pdf?src-supplier=Texas+Instruments, ComponentLink5Description=https://sigma.octopart.com:443/159779760/technical_drawing/Texas-Instruments-TPS561208DDCR.pdf?src-supplier=Texas+Instruments, ComponentLink5URL=https://sigma.octopart.com:443/159779760/technical_drawing/Texas-Instruments-TPS561208DDCR.pdf?src-supplier=Texas+Instruments, ComponentLink6Description=https://sigma.octopart.com:443/149167535/technical_drawing/Texas-Instruments-TPS561208DDCR.pdf?src-supplier=Texas+Instruments, ComponentLink6URL=https://sigma.octopart.com:443/149167535/technical_drawing/Texas-Instruments-TPS561208DDCR.pdf?src-supplier=Texas+Instruments, ComponentLink7Description=https://sigma.octopart.com:443/49250152/technical_drawing/Texas-Instruments-TPS561208DDCR.pdf?src-supplier=Texas+Instruments, ComponentLink7URL=https://sigma.octopart.com:443/49250152/technical_drawing/Texas-Instruments-TPS561208DDCR.pdf?src-supplier=Texas+Instruments, ComponentLink8Description=https://datasheet.octopart.com:443/TPS561208DDCR-Texas-Instruments-datasheet-83961351.pdf?src-supplier=Upverter, ComponentLink8URL=https://datasheet.octopart.com:443/TPS561208DDCR-Texas-Instruments-datasheet-83961351.pdf?src-supplier=Upverter, ComponentLink9Description=https://datasheet.octopart.com:443/TPS561208DDCR-Texas-Instruments-datasheet-165804780.pdf?src-supplier=LCSC, ComponentLink9URL=https://datasheet.octopart.com:443/TPS561208DDCR-Texas-Instruments-datasheet-165804780.pdf?src-supplier=LCSC, ComponentLink10Description=https://datasheet.octopart.com:443/TPS561208DDCR-Texas-Instruments-datasheet-159118147.pdf?src-supplier=LCSC, ComponentLink10URL=https://datasheet.octopart.com:443/TPS561208DDCR-Texas-Instruments-datasheet-159118147.pdf?src-supplier=LCSC, ComponentLink11Description=http://sigma.octopart.com:80/reach_statement/Texas-Instruments-company-64.pdf?src-supplier=Compliance+Statements, ComponentLink11URL=http://sigma.octopart.com:80/reach_statement/Texas-Instruments-company-64.pdf?src-supplier=Compliance+Statements, ComponentLink12Description=http://sigma.octopart.com:80/conflict_mineral_statement/Texas-Instruments-company-63.pdf?src-supplier=Compliance+Statements, ComponentLink12URL=http://sigma.octopart.com:80/conflict_mineral_statement/Texas-Instruments-company-63.pdf?src-supplier=Compliance+Statements, Designed by=Ali

## Via types
v1: diameter 0.6, hole 0.2, Top Layer to Bottom Layer, tented both sides, 6 vias

## Nets (pads, with @x,y where several pads share a name; then routed paths per layer and width w, separated by ;. In a path a pad name is that pad's centre, name@x,y a point inside that pad or via, vN(x,y) a via of type N, cw(c..) or ccw(c..) an arc to the next point about the centre after c; other vN are vias at no path point)
FB: R1.1 R2.2 U1.4 | length 4.5
  Top Layer w0.3: U1.4 24.05,5.05 25.2,3.9 R2.2 R1.1
GND: C2.1 C3.1 J1.2 J2.2 R2.1 U1.1
NetC1_1: C1.1 U1.6 | length 2.6
  Top Layer w0.3: U1.6 24.05,6.95 25.15,8.05 C1.1
NetC2_2: C2.2 J1.1 U1.3 U1.5 | length 6.3
  Top Layer w0.3: U1.5 v1(25.1,6)
  Bottom Layer w0.3: v1(21.55,3.9) 24.3,3.9 25.1,4.7 v1(25.1,6)
OUT: C3.2 J2.1 L1.2 R1.2 | length 14.2
  Top Layer w0.3: v1(20.1,12) 20.6,12.5 27.1,12.5 27.65,11.95 R1.2
SW: C1.2 L1.1 U1.2 | length 15.1
  Top Layer w0.3: L1.1 14.875,6.1 v1(17.4,6.1) ; v1(20.4,6) U1.2 ; C1.2 23.875,9 23.875,10.175 v1(23.9,10.2)
  Bottom Layer w0.3: v1(17.4,6.1) 20.219,6.1 20.319,6 v1(20.4,6) 20.4,9 21.6,10.2 v1(23.9,10.2)

## Polygon pours and split planes (outlines as drawn)
GND on Top Layer "GND_L01_P000" (solid, pour order 0): 0.2,16.6 28.2,16.6 28.2,0.1 0.1,0.1 0.2,0.2

## Keep-outs
Keep-Out Layer:
  the board outline again, w0.1

## Other copper
Top Layer:
  region net NetC2_2: 5,3.4 5.6,4 16.9,4 17.9,4 18.3,4.4 18.3,5 18.7,5.4 22,5.4 22.5,4.9 22.5,1.5 22,1 5.5,1 5,1.5
  region net OUT: 5,12.1 5.6,12.7 20.1,12.7 20.8,12 20.8,8.4 20.4,8 5.5,8 5,8.5
Bottom Layer:
  region net SW: 12.6,5.1 12.9,4.8 21,4.8 21.4,5.2 21.4,9.2 21.9,9.7 24.5,9.7 24.8,10 24.8,10.6 24.5,10.9 19.8,10.9 19.4,10.5 19.4,7.6 18.9,7.1 13.1,7.1 12.6,6.6

## Silkscreen, mask and mechanical layers (free items; w line width, h text height)
Top Overlay:
  text "-" at 1.55,14.2 h1 r90
  text "OUT" at 0.45,13.55 h1 r270
  text "+" at 0.7,9.533 h1
  text "-" at 1.55,5.7 h1 r90
  text "IN" at 0.45,5.05 h1 r270
  text "+" at 0.7,2.033 h1